# Altium PCB mainboard.PcbDoc (part 2 of 2)
Units mil, origin at the board's own origin, x right, y up, seen from the top; angles counter-clockwise.
Board outline 2559.06 x 3545 mil, 4 copper layers (SIG1, GND, PWR, SIG2), stack 61.811 mil thick; 133 components, 106 nets, 436 pads, 349 vias.
Unrouted connection lines stored in the file: 120.
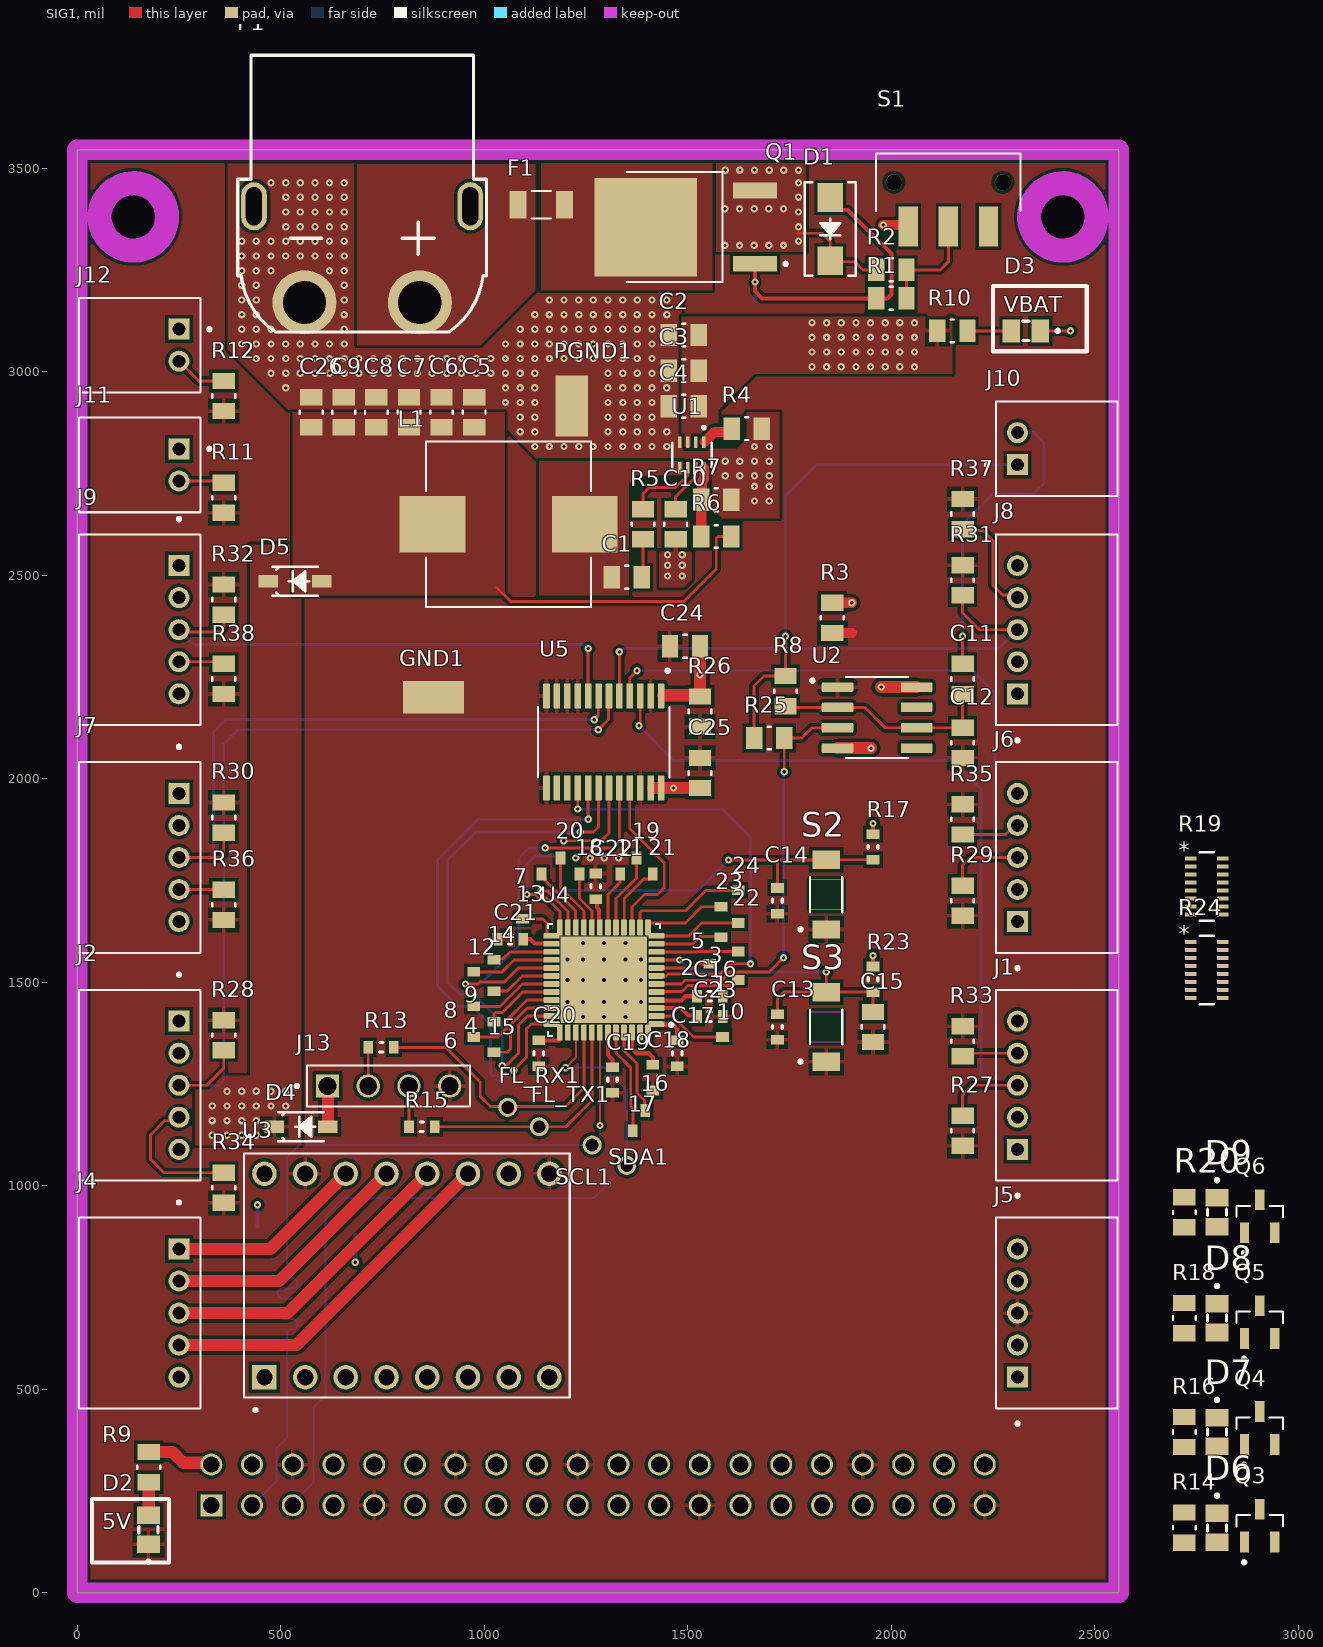
[diagram p0: SIG1 view]

## Polygon pours and split planes (outlines as drawn) (continued)
NetC1_1 on SIG1 "NONET_L-01_P-001" (solid, pour order 17): 1488,2780 1135,2780 1135,2450 1355,2450 1355,2725 1375,2745 1488,2745
PGND on SIG1 "NONET_L-01_P-001" (solid, pour order 26): 1475,2810 1475,2785 1560,2785 1560,2665 1585,2640 1725,2640 1725,2900 1645,2900 1645,2835 1620,2810
NetF1_2 on SIG1 "NONET_L-01_P-001" (solid, pour order 12): 1140,3515 1560,3515 1560,3200 1140,3200
+VBAT on SIG1 "NONET_L-01_P-001" (solid, remove dead copper, pour order 3): 687.85,3064.83 989.83,3064.83 1125,3200 1125,3509.83 687.85,3509.83
NetD1_1 on SIG1 "NONET_L-01_P-001" (solid, remove dead copper, pour order 8): 1570,3295 1570,3515 1790,3515 1790,3295
GND on GND "NONET_L-01_P-001" (solid, pour order 33): 0,2395 2559.06,2395 2559.05,0 0,0
PGND on GND "NONET_L-01_P-001" (solid, pour order 25): 0,3545 2559.06,3545 2559.06,2395 0,2395
+VBAT on PWR "NONET_L-01_P-001" (solid, pour order 31): 0,3545 2559.06,3545 2559.05,0 0,0
3.3V on PWR "NONET_L-01_P-001" (solid, pour order 30): 285,2395 2265,2395 2265,150 285,150
5V_PI on PWR "NONET_L-01_P-001" (solid, pour order 29): 400,275 475,275 475,375 400,375 400,1100 544.26,1100 544.26,1270 290,1270 290,275

## Keep-outs
Keep-Out Layer:
  circle w59.06: c137.8,3380 r82.8
  circle w59.06: c2421.26,3380 r82.8
  lines w50: 0,0 2559.06,0 2559.06,3545 0,3545 0,0

## Silkscreen, mask and mechanical layers (free items; w line width, h text height)
Top Overlay:
  lines w10: 36.22,73.93 36.22,230 225,230 225,73.93 36.22,73.93 ; 2250,3050 2250,3210 2480,3210 2480,3050 2250,3050
  text "VBAT" at 2276.02,3146.02 h39.37
  text "5V" at 61.02,156.02 h39.37

## Text inside footprints (layer, text, board x,y; h text height)
R19: Top Overlay "*" at 2706,1804.9 h39.37; Mechanical 13 "*" at 2756,1769 h39.37
R24: Top Overlay "*" at 2706,1599.9 h39.37; Mechanical 13 "*" at 2756,1564 h39.37